# Altium PCB 400250.PcbDoc (part 1 of 2)
Units mil, origin at the board's own origin, x right, y up, seen from the top; angles counter-clockwise.
Board outline 1812.55 x 600 mil, 2 copper layers (Top Layer, Bottom Layer), stack 80.158 mil thick; 97 components, 62 nets, 288 pads, 110 vias.
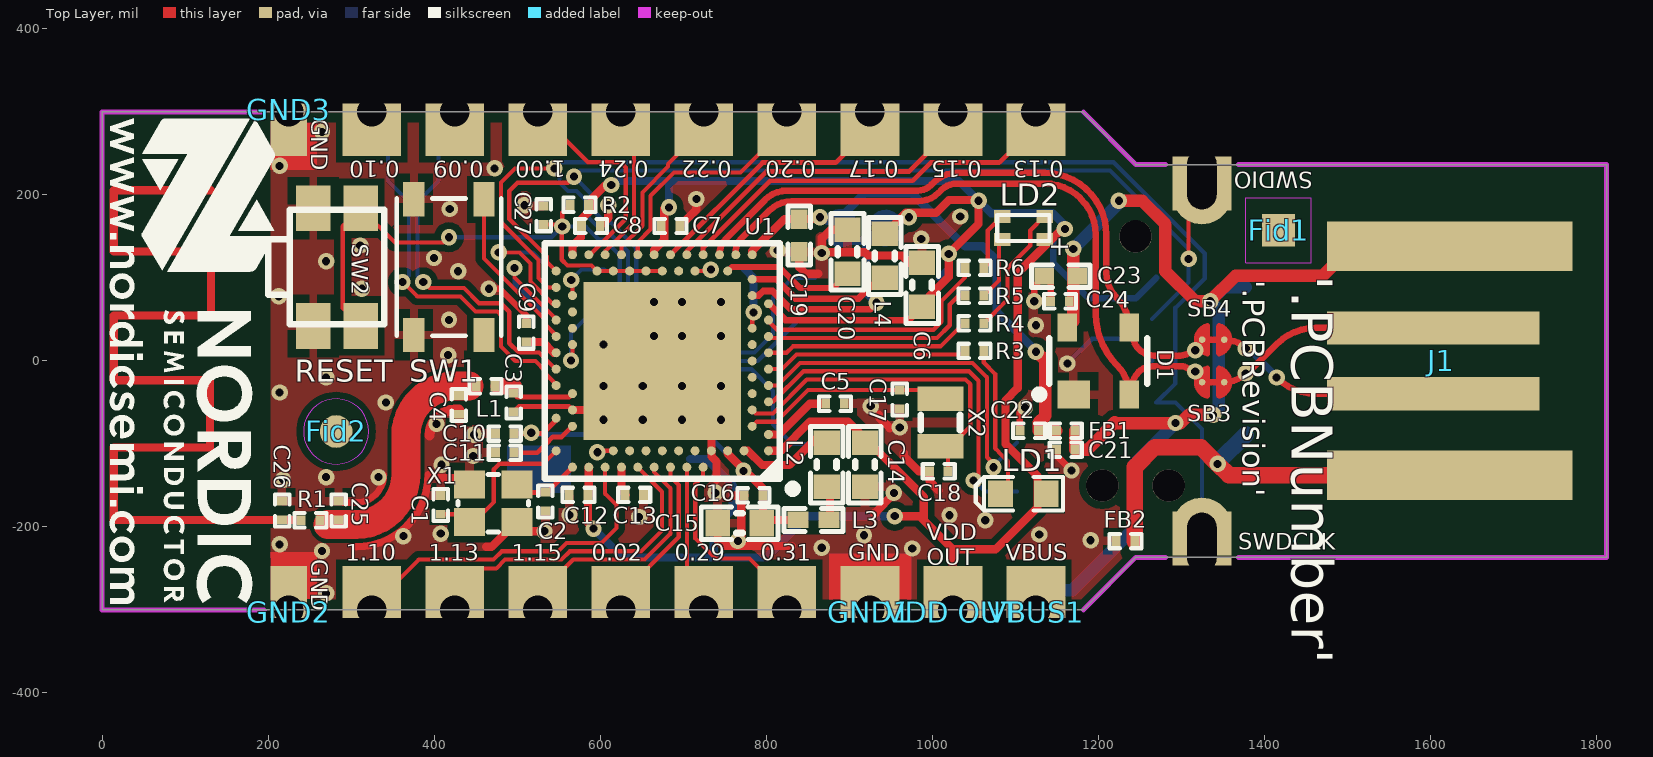
[diagram p0: Top Layer view]
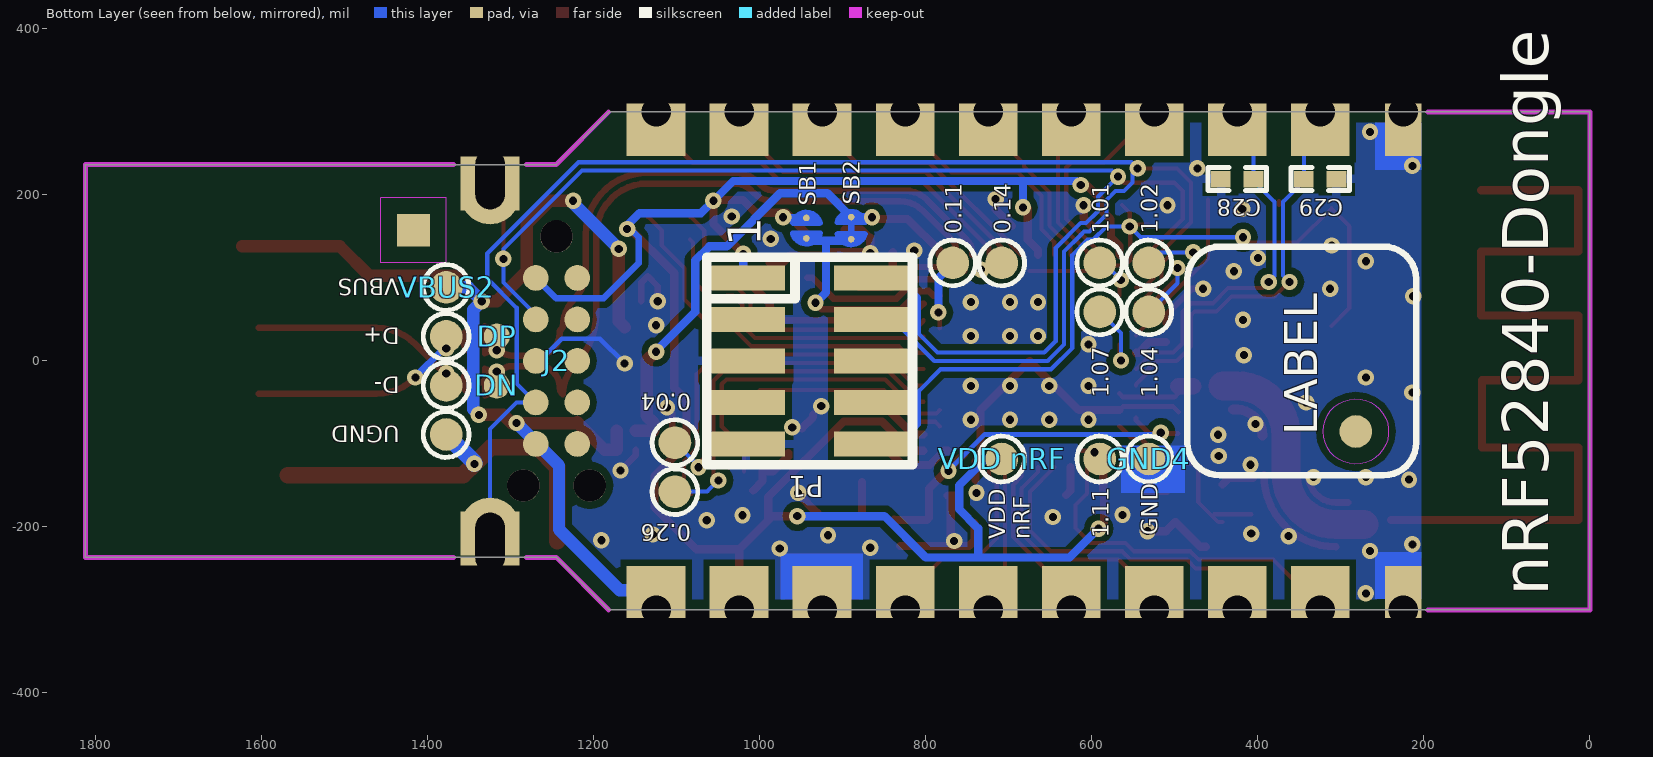
[diagram p1: Bottom Layer view, seen from below]

## Layer stack, top to bottom
Top Solder: solder mask 0.7087, Solder Resist, Dk 3.5
Top Layer: signal copper 0.7087
Dielectric1: core 78.7402, FR-4, Dk 4.8
Bottom Layer: signal copper 0.7087
Bottom Solder: solder mask 0.7087, Solder Resist, Dk 3.5

## Board outline
0,-300 0,300 1182.16,300 1245.55,236.61 1812.55,236.61 1812.55,-236.61 1245.55,-236.61 1182.16,-300

## Design rules (kind name [scope] priority, off if disabled: settings)
Clearance ANT_Clerance [InNet('ANT') or InNet('RF')] p1: gap=5 ignorepadtopadclearanceinfootprint=FALSE except(0: Arc-Hole Track-Hole SMDPad-Hole THPad-Hole Via-Hole Fill-Hole Poly-Hole Region-Hole Text-Hole)
Clearance NPTH [Not PadIsPlated And HoleSize > 0] p2: gap=9 ignorepadtopadclearanceinfootprint=FALSE except(0: Arc-Hole Track-Hole SMDPad-Hole THPad-Hole Via-Hole Fill-Hole Poly-Hole Region-Hole Text-Hole)
Clearance Polygon_Clearance [(InNamedPolygon('Top_Layer-GND')) or (InNamedPolygon('Bottom_Layer-GND')) or (InNamedPolygon('Mid_Layer_1-GND')) or (InNamedPolygon('Mid_Layer_2-GND'))] p3: gap=8 ignorepadtopadclearanceinfootprint=FALSE
Clearance SB_Clearance [HasFootprint('Solderbridge')] p4: gap=5 ignorepadtopadclearanceinfootprint=FALSE except(0: Arc-Hole Track-Hole SMDPad-Hole THPad-Hole Via-Hole Fill-Hole Poly-Hole Region-Hole Text-Hole)
Clearance [All] p5: gap=5 ignorepadtopadclearanceinfootprint=FALSE
ComponentClearance [All] p1 off: gap=10 collisioncheckmode=3 verticalgap=10 showdistances=FALSE
DiffPairsRouting [All] p1: maxlimit=5 minlimit=5 mostfreqgap=5 toplayer_minwidth=7.87 toplayer_maxwidth=7.87 toplayer_prefwidth=7.87 bottomlayer_minwidth=7.87 bottomlayer_maxwidth=7.87 bottomlayer_prefwidth=7.87 maxuncoupledlength=500
FabricationTestPointUsage TestPointUsage [All] p1: valid=0 allowmultiple=FALSE
FabricationTestpoint Testpoint [All] p1: side=3 testpointundercomponent=TRUE minsize=40 maxsize=100 preferedsize=60 minholesize=0 maxholesize=40 preferedholesize=32 testpointgrid=1 allowsidetop=TRUE allowsidebottom=TRUE usegrid=TRUE gridtolerance=0.01
Height [All] p1 off: minheight=0 maxheight=1000 prefheight=500
HoleSize [All] p1: absolutevalues=TRUE maxlimit=100 minlimit=3.94 maxpercent=80.000 minpercent=20.000
MinimumAnnularRing [All] p1 off: minimumring=6
PolygonConnect PolygonConnect_1 [isVia and innet(gnd)] p1: connectstyle=Direct reliefconductorwidth=10 reliefentries=4 polygonreliefangle="90 Angle" airgapwidth=10
PolygonConnect [All] p2: connectstyle=Relief reliefconductorwidth=10 reliefentries=4 polygonreliefangle="90 Angle" airgapwidth=10
RoutingVias [All] p1: holewidth=9.84 width=19.68 viastyle="Through Hole" minholewidth=3.94 minwidth=11.81 maxholewidth=12 maxwidth=24
SilkToSolderMaskClearance SilkscreenOverComponentPads [IsPad] p1: minsilkscreentomaskgap=10 clearancetoexposedcopper=TRUE
SolderMaskExpansion [All] p1: expansion=3
Width [All] p1: maxlimit=100 minlimit=5 preferedwidth=6 minimp=50.000000 maximp=50.000000 favimp=50.000000
23 further rules are at their usual default settings.

## Classes and differential pairs
differential pair D: +D_P -D_N

## Components (designator, comment, footprint, x,y, rotation, side; value= is the part's Value field where it differs from the comment)
0.02 "CH" Castellated_Hole_0.9mm 625,-300 r0 top locked
0.04 "Ø1.0mm,SMD" TP_SMD_Ø1.0mm#1 1102.36,-98.43 r180 bottom locked
0.09 "CH" Castellated_Hole_0.9mm 425,300 r180 top locked
0.10 "CH" Castellated_Hole_0.9mm 325,300 r180 top locked
0.11 "Ø1.0mm,SMD" TP_SMD_Ø1.0mm#1 767.72,118.11 r180 bottom locked
0.13 "CH" Castellated_Hole_0.9mm 1125,300 r180 top locked
0.14 "Ø1.0mm,SMD" TP_SMD_Ø1.0mm#1 708.66,118.11 r180 bottom locked
0.15 "CH" Castellated_Hole_0.9mm 1025,300 r180 top locked
0.17 "CH" Castellated_Hole_0.9mm 925,300 r180 top locked
0.20 "CH" Castellated_Hole_0.9mm 825,300 r180 top locked
0.22 "CH" Castellated_Hole_0.9mm 725,300 r180 top locked
0.24 "CH" Castellated_Hole_0.9mm 625,300 r180 top locked
0.26 "Ø1.0mm,SMD" TP_SMD_Ø1.0mm#1 1102.36,-157.48 r180 bottom locked
0.29 "CH" Castellated_Hole_0.9mm 725,-300 r0 top locked
0.31 "CH" Castellated_Hole_0.9mm 825,-300 r0 top locked
1.00 "CH" Castellated_Hole_0.9mm 525,300 r180 top locked
1.01 "Ø1.0mm,SMD" TP_SMD_Ø1.0mm#1 590.55,118.11 r180 bottom locked
1.02 "Ø1.0mm,SMD" TP_SMD_Ø1.0mm#1 531.5,118.11 r180 bottom locked
1.04 "Ø1.0mm,SMD" TP_SMD_Ø1.0mm#1 531.5,59.06 r180 bottom locked
1.07 "Ø1.0mm,SMD" TP_SMD_Ø1.0mm#1 590.55,59.06 r180 bottom locked
1.10 "CH" Castellated_Hole_0.9mm 325,-300 r0 top locked
1.11 "Ø1.0mm,SMD" TP_SMD_Ø1.0mm#1 590.55,-118.11 r180 bottom locked
1.13 "CH" Castellated_Hole_0.9mm 425,-300 r0 top locked
1.15 "CH" Castellated_Hole_0.9mm 525,-300 r0 top locked
C1 "12pF" CAPC0603X03L_C 408.16,-173.47 r90 top locked
C2 "12pF" CAPC0603X03L_C 534.16,-169.47 r270 top locked
C3 "1.0pF" CAPC0603X03L_C 495.8,-50.21 r90 top locked
C4 "1.0pF" CAPC0603X03L_C 430,-53 r90 top locked
C5 "100nF" CAPC0603X03L_C 883,-51.42 r0 top locked
C6 "4.7µF" CAPC1608X06L 988,91.58 r90 top locked
C7 "100nF" CAPC0603X03L_C 685,162.58 r0 top locked
C8 "100nF" CAPC0603X03L_C 589,162.58 r0 top locked
C9 "820pF" CAPC0603X03L_C 511,34 r90 top locked
C10 "N.C." CAPC0603X03L_C 485.16,-87.47 r0 top locked
C11 "100pF" CAPC0603X03L_C 485.16,-110.47 r180 top locked
C12 "100nF" CAPC0603X03L_C 574.16,-161.47 r180 top locked
C13 "N.C." CAPC0603X03L_C 641.16,-161.47 r0 top locked
C14 "1.0µF" CAPC1608X06L 919,-125 r270 top locked
C15 "1.0µF" CAPC1608X06L 768.16,-195.47 r0 top locked
C16 "47nF" CAPC0603X03L_C 785,-162 r180 top locked
C17 "12pF" CAPC0603X03L_C 961,-46.42 r270 top locked
C18 "12pF" CAPC0603X03L_C 1008,-133 r180 top locked
C19 "4.7µF" CAPC1005X04L 840,151 r270 top locked
C20 "4.7µF" CAPC1608X06L 898,131.58 r90 top locked
C21 "10nF" CAPC0603X03L_C 1161,-107 r0 top locked
C22 "100nF" CAPC0603X03L_C 1117,-84 r0 top locked
C23 "4.7µF" CAPC1005X04L 1155,102 r0 top locked
C24 "100nF" CAPC0603X03L_C 1154,72 r0 top locked
C25 "N.C." CAPC0603X03L_C 285,-180 r90 top locked
C26 "1.5pF" CAPC0603X03L_C 217,-180 r270 top locked
C27 "100nF" CAPC0603X03L_C 532,175.5 r270 top locked
C28 "N.C." CAPC1005X04L 425,219 r180 bottom locked
C29 "N.C." CAPC1005X04L 325,219 r180 bottom locked
D1 "PRTR5V0U2X" SOT190P230X110-4L 1200,0 r90 top locked
D+ "Ø1.0mm,SMD" TP_SMD_Ø1.0mm#1 1377.95,29.53 r180 bottom locked
D- "Ø1.0mm,SMD" TP_SMD_Ø1.0mm#1 1377.95,-29.53 r180 bottom locked
DN "Ø1.0mm,SMD" TP_SMD_Ø1.0mm#2 1316.93,-29.53 r270 bottom locked
DP "Ø1.0mm,SMD" TP_SMD_Ø1.0mm#2 1316.93,29.53 r270 bottom locked
FB1 "120R/0.85A" INDC0603X03L_C 1161,-84 r180 top locked
FB2 "120R/0.85A" INDC0603X03L_C 1233,-217 r180 top locked
Fid1 "Fiducial mark" Fiducial_Square 1417.32,157.48 r0 top locked
Fid2 "Fiducial mark" Fiducial 282,-85 r0 top locked
GND1 "GND" Castellated_Hole_0.9mm 925,-300 r0 top locked
GND2 "GND" Castellated_Hole_0.9mm_S 225,-300 r0 top locked
GND3 "GND" Castellated_Hole_0.9mm_S 225,300 r180 top locked
GND4 "GND" TP_SMD_Ø1.0mm#1 531.5,-118.11 r180 bottom locked
J1 "USB-A" USB-A-PCB 1615.7,0.39 r180 top locked
J2 "TC2050-IDC" TC2050-IDC-NLFP 1245,0 r270 bottom locked
L1 "3.9nH" INDC0603X03L_C 462.16,-30.34 r180 top locked
L2 "10µH" INDC1608X06L 873,-125 r90 top locked
L3 "15nH" INDC1005X04L 857,-191.42 r0 top locked
L4 "10µH" INDC1608X06L 943,126.58 r270 top locked
LD1 "L0603G" LED_0603_G 1110,-160 r0 top locked
LD2 "LED RGB" LED_RGB_0603 1110,160 r90 top locked
P1 "Pin Header 2x5, 1.27mm" HDR_2x5-SMD-1.27mm-NC 940,0 r270 bottom locked
R1 "0R" RESC0603X03L_C 251,-192 r180 top locked
R2 "10k" RESC0603X03L_C 575,188 r0 top locked
R3 "220R" RESC0603X03L_C 1051,12 r0 top locked
R4 "1k2" RESC0603X03L_C 1051,45.33 r0 top locked
R5 "2k2" RESC0603X03L_C 1051,78.67 r0 top locked
R6 "390R" RESC0603X03L_C 1051,112 r0 top locked
SB1 "Solderbridge" Solderbridge 944,160 r270 bottom locked
SB2 "Solderbridge" Solderbridge_Shorted 890,160 r90 bottom locked net-tie
SB3 "Solderbridge" Solderbridge_Shorted 1338.58,-25.59 r0 top locked net-tie
SB4 "Solderbridge" Solderbridge_Shorted 1338.58,25.59 r0 top locked net-tie
SW1 "PB SW" C&K_PTS810 418,113 r270 top locked
SW2 "PTS840 GK SMTR LFS" EVQP7A/J/B/K 283,113 r270 top locked
SWDCLK "CH" Castellated_Hole_0.9mm_D 1325,-218.9 r0 top locked
SWDIO "CH" Castellated_Hole_0.9mm_D 1325,218.9 r180 top locked
U1 "nRF52840-QIAA" AQFN50P700X700X85_HS-74N 675,0 r180 top locked
UGND "Ø1.0mm,SMD" TP_SMD_Ø1.0mm#1 1377.95,-88.58 r180 bottom locked
VBUS1 "VBUS" Castellated_Hole_0.9mm 1125,-300 r0 top locked
VBUS2 "VBUS" TP_SMD_Ø1.0mm#1 1377.95,88.58 r180 bottom locked
"VDD nRF" "Ø1.0mm,SMD" TP_SMD_Ø1.0mm#1 708.66,-118.11 r180 bottom locked
"VDD OUT" "CH" Castellated_Hole_0.9mm 1025,-300 r0 top locked
X1 "32MHz" BT-XTAL_2016 471.16,-171.47 r0 top locked
X2 "32.768kHz" XTAL_2012 1010,-74 r270 top locked

## Footprints (in the part's own frame and the unit in brackets; to place one, negate y for a bottom-side part, rotate by r counter-clockwise, add the part's x,y. Pads: shape width x height; smd on the part's side, far side on the other; paste and mask are expansions set on the pad)
AQFN50P700X700X85_HS-74N [mm] "AQFN, 73-Leads, Body 7.00x7.00mm, Pitch 0.50mm, Thermal Pad 4.95x4.95mm, IPC Medium Density"
  rect 4.83x4.83 smd mask+0.05: 74(0,0)
  round 0.275 smd paste+0.012 mask+0.05: A8(-1.25,3.25) A10(-0.75,3.25) A12(-0.25,3.25) A14(0.25,3.25) A16(0.75,3.25) A18(1.25,3.25) A20(1.75,3.25) A22(2.25,3.25) A23(2.75,3.25) AA24(3.25,-2.25) AB2(-2.75,-2.5) AC5(-2,-2.75) AC9(-1,-2.75) AC11(-0.5,-2.75) AC13(0,-2.75) AC15(0.5,-2.75) AC17(1,-2.75) AC19(1.5,-2.75) AC21(2,-2.75) AC24(3.25,-2.75) AD2(-2.75,-3.25) AD4(-2.25,-3.25) AD6(-1.75,-3.25) AD8(-1.25,-3.25) AD10(-0.75,-3.25) AD12(-0.25,-3.25) AD14(0.25,-3.25) AD16(0.75,-3.25) AD18(1.25,-3.25) AD20(1.75,-3.25) AD22(2.25,-3.25) AD23(2.75,-3.25) B1(-3.25,2.75) B3(-2.5,2.75) B5(-2,2.75) B7(-1.5,2.75) B9(-1,2.75) B11(-0.5,2.75) B13(0,2.75) B15(0.5,2.75) B17(1,2.75) B19(1.5,2.75) B24(3.25,2.75) C1(-3.25,2.25) D2(-2.75,2) D23(2.75,2) E24(3.25,1.75) F2(-2.75,1.5) F23(2.75,1.5) G1(-3.25,1.25) H2(-2.75,1) H23(2.75,1) J1(-3.25,0.75) J24(3.25,0.75) K2(-2.75,0.5) L1(-3.25,0.25) L24(3.25,0.25) M2(-2.75,0) N1(-3.25,-0.25) N24(3.25,-0.25) P2(-2.75,-0.5) P23(2.75,-0.5) R1(-3.25,-0.75) R24(3.25,-0.75) T2(-2.75,-1) T23(2.75,-1) U1(-3.25,-1.25) U24(3.25,-1.25) V23(2.75,-1.5) W1(-3.25,-1.75) W24(3.25,-1.75) Y2(-2.75,-2) Y23(2.75,-2)
  silkscreen extent -4.11,-3.6 3.6,4.04, body extent -3.55,-3.55 3.55,3.55, height 0.85
BT-XTAL_2016 [mm] "Crystal 2.0 x 1.6 mm"
  rect 0.95x0.85 smd: 1(-0.725,-0.575) 2(0.725,-0.575) 3(0.725,0.575) 4(-0.725,0.575)
  silkscreen extent -1.08,-0.88 1.08,0.88, body extent -1.05,-0.85 1.05,0.85, height 0.56
C&K_PTS810 [mm] "Microminiature SMT Top Actuated"
  rect 1.05x0.65 smd: 0(2.075,1.075) 1(-2.075,1.075) 2(-2.075,-1.075) 2(2.075,-1.075)
  silkscreen extent -2.1,-1.6 2.1,1.6, body extent -2.29,-1.6 2.29,1.6, height 2.5
CAPC0603X03L_C [mm] "Chip Capacitor, 2-Leads, Body 0.6x0.3mm, IPC High Density"
  rect 0.27x0.3 smd: 1(-0.285,0) 2(0.285,0)
  silkscreen extent -0.49,-0.22 0.49,0.22, body extent -0.3,-0.15 0.31,0.15, height 0.3
CAPC1005X04L [mm] "Chip Capacitor, 2-Leads, Body 1.0x0.5mm, IPC High Density"
  rect 0.6x0.5 smd: 1(-0.5,0) 2(0.5,0)
  silkscreen extent -0.9,-0.35 0.9,0.35, body extent -0.51,-0.25 0.51,0.25, height 0.5
CAPC1608X06L [mm] "Chip Capacitor, 2-Leads, Body 1.6x0.8mm, IPC High Density"
  rect 0.75x0.8 smd: 1(-0.675,0) 2(0.675,0)
  silkscreen extent -1.17,-0.5 1.17,0.5, body extent -0.8,-0.43 0.8,0.43, height 0.8
Castellated_Hole_0.9mm [mm]
  rect 1.8x0.25 hole 0.25 square: 1(0,-0.126)
  rect 1.8x1.35 hole 0.9 copper offset 0,0.675: 1(0,0)
Castellated_Hole_0.9mm_D [mm]
  rect 1.8x0.25 hole 0.25 square: 1(0,-0.576)
  rect 1.8x1.35 hole 0.9 slot 1.83 at 90 deg copper offset 0,0.275: 1(0,0)
  round 1.8 smd paste-5: 1(0,0.48)
  round 1.8 smd far side paste-5: 1(0,0.48)
Castellated_Hole_0.9mm_S [mm]
  rect 1.118x0.25 hole 0.25 square: 1(0,-0.126)
  rect 1.118x1.35 hole 0.9 copper offset 0,0.675: 1(0,0)
EVQP7A/J/B/K [mm] "Subminiature Side Actuated Tact Switch for SMT"
  rect 1.4x1.05 smd: 1(-1.8,0.725) 1(1.8,0.725) 2(-1.8,-0.725) 2(1.8,-0.725)
  silkscreen extent -1.75,-2.1 1.75,1.45, body extent -2.35,-2.1 2.35,1.45, height 1.35
Fiducial [mm] "Fiducial Mark"
  round 1 smd paste+0 mask+0.5: 0(0,0)
  round 1 smd far side paste+0 mask+0.5: 0(0,0)
  Top Layer keep-out circle w0.01: c0,0 r1
  Bottom Layer keep-out circle w0.01: c0,0 r1
Fiducial_Square [mm] "Fiducial Mark"
  rect 1x1 smd paste-10 mask+0.5: 0(0,0)
  rect 1x1 smd far side paste-10 mask+0.5: 0(0,0)
  Top Layer keep-out lines w0.01: -1,-1 1,-1 1,1 -1,1 -1,-1
  Bottom Layer keep-out lines w0.01: -1,-1 -1,1 1,1 1,-1 -1,-1
HDR_2x5-SMD-1.27mm-NC [mm] "SMT MICRO HEADER, (1,27) .050\""
  rect 0.76x2.4 smd: 1(-2.54,-1.95) 2(-2.54,1.95) 3(-1.27,-1.95) 4(-1.27,1.95) 5(0,-1.95) 6(0,1.95) 7(1.27,-1.95) 8(1.27,1.95) 9(2.54,-1.95) 10(2.54,1.95)
  silkscreen extent -3.18,-3.15 3.18,3.15
INDC0603X03L_C [mm] "Chip Inductor, 2-Leads, Body 0.6x0.3mm, IPC High Density"
  rect 0.27x0.3 smd: 1(-0.285,0) 2(0.285,0)
  silkscreen extent -0.49,-0.22 0.49,0.22, body extent -0.31,-0.16 0.31,0.16, height 0.26
INDC1005X04L [mm] "Chip Inductor, 2-Leads, Body 1.0x0.5mm, IPC High Density"
  rect 0.65x0.5 smd: 1(-0.475,0) 2(0.475,0)
  silkscreen extent -0.9,-0.35 0.9,0.35, body extent -0.5,-0.3 0.5,0.3, height 0.5
INDC1608X06L [mm] "Chip Inductor, 2-Leads, Body 1.6x0.8mm, IPC High Density"
  rect 0.75x0.8 smd: 1(-0.675,0) 2(0.675,0)
  silkscreen extent -1.17,-0.5 1.17,0.5, body extent -0.8,-0.48 0.8,0.48, height 0.8
LED_0603_G [mil] "SMD Super Bright LED, GREEN"
  rect 30x32 smd: 1(-27.5,0) 2(27.5,0)
  silkscreen extent -58,-20 48,20, body extent -32,-16 32,16, height 24
LED_RGB_0603 [mm]
  rect 0.4x0.5 smd paste+0: 1(0.35,-0.65) 2(-0.35,0.65) 3(0.35,0.65) 4(-0.35,-0.65)
  silkscreen extent -0.4,-0.8 0.4,0.8, body extent -0.4,-0.8 0.4,0.8, height 0.5
RESC0603X03L_C [mm] "Chip Resistor, 2-Leads, Body 0.6x0.3mm, IPC High Density"
  rect 0.27x0.3 smd: 1(-0.285,0) 2(0.285,0)
  silkscreen extent -0.49,-0.22 0.49,0.22, body extent -0.3,-0.15 0.3,0.15, height 0.23
Solderbridge [mm]
  round 0.2 smd paste-10: 1(-0.312,0) 2(0.312,0)
  Top Layer region: -0.077,-0.432 -0.152,-0.505 -0.271,-0.467 -0.335,-0.424 -0.409,-0.351 -0.462,-0.292 -0.521,-0.193 -0.549,-0.099 -0.544,0.122 -0.518,0.193 -0.434,0.33 -0.351,0.411 -0.259,0.469 -0.157,0.5 -0.107,0.483 -0.077,0.43
  Top Layer region: 0.077,0.432 0.152,0.505 0.271,0.467 0.335,0.424 0.409,0.351 0.462,0.292 0.521,0.193 0.549,0.099 0.544,-0.122 0.518,-0.193 0.434,-0.33 0.351,-0.411 0.259,-0.469 0.157,-0.5 0.107,-0.483 0.077,-0.43
  Top Layer lines w0.152: 0.153,0.431 cw(c0.042,0) 0.383,0.286 cw(c0.042,0) 0.478,-0.088 cw(c0.042,0) 0.153,-0.431 ; -0.153,0.431 ccw(c-0.042,0) -0.312,-0.353 ccw(c-0.042,0) -0.153,-0.431
Solderbridge_Shorted [mm]
  round 0.2 smd paste-10: 1(-0.338,0) 2(0.338,0)
  Top Layer region: 0.102,0.432 0.178,0.505 0.296,0.467 0.361,0.424 0.434,0.351 0.488,0.292 0.546,0.193 0.574,0.099 0.569,-0.122 0.544,-0.193 0.46,-0.33 0.376,-0.411 0.284,-0.469 0.183,-0.5 0.132,-0.483 0.102,-0.43
  Top Layer region: -0.102,-0.432 -0.178,-0.505 -0.296,-0.467 -0.361,-0.424 -0.434,-0.351 -0.488,-0.292 -0.546,-0.193 -0.574,-0.099 -0.569,0.122 -0.544,0.193 -0.46,0.33 -0.376,0.411 -0.284,0.469 -0.183,0.5 -0.132,0.483 -0.102,0.43
  Top Layer lines w0.152: -0.178,-0.431 cw(c-0.068,0) -0.178,0.431 ; 0.178,-0.431 ccw(c0.068,0) 0.178,0.431
  Top Layer lines w0.203: -0.338,0 0.338,0
SOT190P230X110-4L [mm] "SOT143, 4-Leads, Body 3.0x2.5mm (max), Pitch 1.90mm, IPC High Density"
  rect 0.85x1 smd: 1(-1.025,0.75)
  rect 0.85x0.6 smd: 2(-1.025,-0.95) 3(1.025,-0.95) 4(1.025,0.95)
  silkscreen extent -1.15,-1.5 0.7,1.92, body extent -1.21,-1.46 1.21,1.46, height 1
TC2050-IDC-NLFP [mil]
  round 39 hole 39 unplated: 0(-150,0) 0(150,-40) 0(150,40)
  round 31 smd paste-196.85: 1(-100,-25) 2(-50,-25) 3(0,-25) 4(50,-25) 5(100,-25) 6(100,25) 7(50,25) 8(0,25) 9(-50,25) 10(-100,25)
  Top Layer pour cut-out: -100,25 -100,-25 100,-25 100,25
TP_SMD_Ø1.0mm#1 [mm]
  round 1 smd paste-5: 1(0,0)
  silkscreen extent -0.7,-0.7 0.7,0.7
TP_SMD_Ø1.0mm#2 [mm]
  round 0.8 smd paste-5: 1(0,0)
USB-A-PCB [mil]
  rect 296x60 smd paste-196.85: 1(-7.87,-137.8) 4(-7.87,138)
  rect 256x40 smd paste-196.85: 2(12,-39.37) 3(12,40)
XTAL_2012 [mm] "XTAL SMD 2.0 x 1.2 mm"
  rect 0.75x1.4 smd: 1(-0.725,0) 2(0.725,0)
  silkscreen extent -0.24,-0.6 0.24,0.6, body extent -1,-0.61 1,0.61, height 0.6

## Part data
0.02 0.09 0.10 0.13 0.15 0.17 0.20 0.22 0.24 0.29 0.31 1.00 1.10 1.13 1.15 GND1 VBUS1 "VDD OUT": library part "Castellated Hole 0.9mm", "Castellated Hole 0.9mm", Artikkelnr Noca=N.A., Artikkelnr Simpro=N.A., ComponentLink1Description=Datasheet, ComponentLink2Description="Supplier link", LatestRevisionDate=2016-08-22, Part Number="Castellated Hole 0.9mm", Pin Count=1, Published=2016-08-22, Publisher="Nordic Semiconductor"
0.04 0.11 0.14 0.26 1.01 1.02 1.04 1.07 1.11 D+ D- DN DP GND4 UGND VBUS2 "VDD nRF": library part TP_SMD_Ø1.0MM, "1.0mm circular SMD testpad", Manufacturer="Nordic Semiconductor", Artikkelnr Noca=N.A., Artikkelnr Simpro=N.A., ComponentLink1Description=Datasheet, ComponentLink2Description="Supplier link", Footprint Doc=TP_SMD_Ø1.0mm, LatestRevisionDate=2013-06-11, Part Number=TP_SMD_Ø1.0MM, Pin Count=1, Published=2013-06-11, Publisher="Nordic Semiconductor"
C1 C2 C17 C18: library part C0201-12p, "Capacitor, NP0, ±2%", Part number IPS=00000007848, Artikkelnr Noca=N.A., Artikkelnr Simpro=N.A., ComponentLink1Description=Datasheet, ComponentLink2Description="Supplier link", Footprint Doc=0201, LatestRevisionDate=2017-11-09, Note=25V, Part Number=C0201-12p, Pin Count=2, Published=2014-11-13, Publisher="Nordic Semiconductor"
C3 C4: library part C0201-1.0p, "Capacitor, NP0, ±5%", Part number IPS=00000001247, Artikkelnr Noca=N.A., Artikkelnr Simpro=N.A., ComponentLink1Description=Datasheet, ComponentLink2Description="Supplier link", Footprint Doc=0201, LatestRevisionDate=2017-11-09, Note=50V, Part Number=C0201-1.0p, Pin Count=2, Published=2014-11-13, Publisher="Nordic Semiconductor"
C5 C7 C8 C12 C22 C24 C27: library part C0201-100n, "Capacitor, X5R, ±10%", Part number IPS=00000001248, Artikkelnr Noca=N.A., Artikkelnr Simpro=N.A., ComponentLink1Description=Datasheet, ComponentLink2Description="Supplier link", Footprint Doc=0201, LatestRevisionDate=2017-11-09, Note=16V, Part Number=C0201-100n, Pin Count=2, Published=2014-11-13, Publisher="Nordic Semiconductor"
C6 C20: library part C0603-4µ7, "Capacitor, X5R, ±10%", Part number IPS=00000007783, Artikkelnr Noca=20069060, Artikkelnr Simpro=N.A., ComponentLink1Description=Datasheet, ComponentLink2Description="Supplier link", Footprint Doc=0603, LatestRevisionDate=2009-11-23, Note=6.3V, Part Number=C0603-4µ7, Pin Count=2, Published=2009-05-08, Publisher="Nordic Semiconductor"
C9: library part C0201-820p, "Capacitor, X7R, ±10%", Part number IPS=00000001249, Artikkelnr Noca=N.A., Artikkelnr Simpro=N.A., ComponentLink1Description=Datasheet, ComponentLink2Description="Supplier link", Footprint Doc=0201, LatestRevisionDate=2017-11-09, Note=25V, Part Number=C0201-820p, Pin Count=2, Published=2014-11-13, Publisher="Nordic Semiconductor"
C10 C13 C25: library part C0201-N.C., "Not mounted", Artikkelnr Noca=N.A., Artikkelnr Simpro=N.A., Assembly="Not mounted", ComponentLink1Description=Datasheet, ComponentLink2Description="Supplier link", Footprint Doc=0201, LatestRevisionDate=2014-11-13, Note="Chip Cap", Part Number=C0201-N.C., Pin Count=2, Published=2014-11-13, Publisher="Nordic Semiconductor"
C11: library part C0201-100p, "Capacitor, NP0, ±2%", Part number IPS=00000007853, Artikkelnr Noca=N.A., Artikkelnr Simpro=N.A., ComponentLink1Description=Datasheet, ComponentLink2Description="Supplier link", Footprint Doc=0201, LatestRevisionDate=2017-11-09, Note=25V, Part Number=C0201-100p, Pin Count=2, Published=2014-11-13, Publisher="Nordic Semiconductor"
C14 C15: library part C0603-1µ0, "Capacitor, X7R, ±10%", Part number IPS=00000000616, Artikkelnr Noca=20039335, Artikkelnr Simpro=N.A., ComponentLink1Description=Datasheet, ComponentLink2Description="Supplier link", Footprint Doc=0603, LatestRevisionDate=2013-06-05, Note=16V, Part Number=C0603-1µ0, Pin Count=2, Published=2009-05-08, Publisher="Nordic Semiconductor"
C16: library part C0201-47n, "Capacitor, X5R, ±10%", Part number IPS=00000001250, Artikkelnr Noca=N.A., Artikkelnr Simpro=N.A., ComponentLink1Description=Datasheet, ComponentLink2Description="Supplier link", Footprint Doc=0201, LatestRevisionDate=2017-11-09, Note=10V, Part Number=C0201-47n, Pin Count=2, Published=2014-11-13, Publisher="Nordic Semiconductor"
C19 C23: library part C0402-4µ7, "Capacitor, X5R, ±20%", Part number IPS=00000001251, Supplier part number=490-13252-1-ND, Artikkelnr Noca=20039482, Artikkelnr Simpro=N.A., ComponentLink1Description=Datasheet, ComponentLink2Description="Supplier link", Footprint Doc=0402, LatestRevisionDate=2017-11-09, Note=10V, Part Number=C0402-4µ7, Pin Count=2, Published=2009-05-08, Publisher="Nordic Semiconductor", Supplier=Digi-Key
C21: library part C0201-10n, "Capacitor, X7R, ±10%", Part number IPS=00000003480, Artikkelnr Noca=N.A., Artikkelnr Simpro=N.A., ComponentLink1Description=Datasheet, ComponentLink2Description="Supplier link", Footprint Doc=0201, LatestRevisionDate=2017-11-09, Note=10V, Part Number=C0201-10n, Pin Count=2, Published=2014-11-13, Publisher="Nordic Semiconductor"
C26: library part C0201-1.5p, "Capacitor, NP0, ±0.1pF", Part number IPS=00000007107, Artikkelnr Noca=N.A., Artikkelnr Simpro=N.A., ComponentLink1Description=Datasheet, ComponentLink2Description="Supplier link", Footprint Doc=0201, LatestRevisionDate=2017-11-09, Note=50V, Part Number=C0201-1.5p, Pin Count=2, Published=2014-11-13, Publisher="Nordic Semiconductor"
C28 C29: library part C0402-N.C., "Not mounted", Artikkelnr Noca=N.A., Artikkelnr Simpro=N.A., Assembly="Not mounted", ComponentLink1Description=Datasheet, ComponentLink2Description="Supplier link", Footprint Doc=0402, LatestRevisionDate=2009-05-08, Note="Chip Cap", Part Number=C0402-N.C., Pin Count=2, Published=2009-05-08, Publisher="Nordic Semiconductor"
D1: "Ultra low capacitance double rail-to-rail ESD protection diode", 2nd source part number=152-4157, Manufacturer=NXP, Part number IPS=00000009951, Supplier part number=568-4140-1-ND, 2nd source Supplier=Farnell, Artikkelnr Noca=10069015, Artikkelnr Simpro=N.A., ComponentLink1Description=Datasheet, ComponentLink2Description="Supplier link", Footprint Doc=SOT-143B, HelpURL=http://www.farnell.com/datasheets/109718.pdf, LatestRevisionDate=2017-11-09, Manufacturer Part Number=PRTR5V0U2X, Part Number=PRTR5V0U2X, Pin Count=4, Published=2012-06-11, Publisher="Nordic Semiconductor", Supplier=Digi-Key
FB1 FB2: library part FB0201-120R@100M-850mA, "Ferrite Bead, 120 Ohm @ 100MHz, 850mA, 150 mOhm Max", Manufacturer="Taiyo Yuden", Manufacturer Part Number=BKP0603HS121-T, Part number IPS=00000001252, Supplier part number=587-3286-1-ND, Artikkelnr Noca=N.A., Artikkelnr Simpro=N.A., ComponentLink1Description=Datasheet, ComponentLink2Description="Supplier link", Footprint Doc=0402, HelpURL=http://ds.yuden.co.jp/TYCOMPAS/ut/detail.do?productNo=BKP0603HS121-T&fileName=BKP0603HS121-T_SS&mode=specSheetDownload, LatestRevisionDate=2016-08-23, Note="Chip EMIFIL Inductor Type Chip Ferrite Bead", Part Number=FB0201-120R@100M-850mA, Pin Count=2, Published=2016-08-23, Publisher="Nordic Semiconductor", Supplier=Digi-Key
Fid1: library part Fid-Mark-Square, "Fiducial Mark", Artikkelnr Noca=N.A., Artikkelnr Simpro=N.A., ComponentLink1Description=Datasheet, ComponentLink2Description="Supplier link", Footprint Doc=Fiducial, LatestRevisionDate=2017-01-30, Part Number=Fid-Mark-Square, Pin Count=1, Published=2009-12-12, Publisher="Nordic Semiconductor"
Fid2: library part Fid-Mark, "Fiducial Mark", Artikkelnr Noca=N.A., Artikkelnr Simpro=N.A., ComponentLink1Description=Datasheet, ComponentLink2Description="Supplier link", Footprint Doc=Fiducial, LatestRevisionDate=2009-12-12, Part Number=Fid-Mark, Pin Count=1, Published=2009-12-12, Publisher="Nordic Semiconductor"
GND2 GND3: library part "Castellated Hole 0.9mm_S", "Castellated Hole 0.9mm", Artikkelnr Noca=N.A., Artikkelnr Simpro=N.A., ComponentLink1Description=Datasheet, ComponentLink2Description="Supplier link", LatestRevisionDate=2018-01-24, Part Number="Castellated Hole 0.9mm_S", Pin Count=1, Published=2018-01-24, Publisher="Nordic Semiconductor"
J1: library part USB-A-PCB, "USB-A PCB footprint", Artikkelnr Noca=N.A., Artikkelnr Simpro=N.A., ComponentLink1Description=Datasheet, ComponentLink2Description="Supplier link", Footprint Doc=USB-A-PCB, LatestRevisionDate=2014-06-04, Part Number=USB-A-PCB, Pin Count=4, Published=2014-06-04, Publisher="Nordic Semiconductor"
J2: library part TC2050-IDC-NLFP, "CBL PLUG-OF-NAILS 10-PIN", Manufacturer="Tag-Connect LLC", Supplier part number=TC2050-IDC-NL-ND, Artikkelnr Noca=N.A., Artikkelnr Simpro=N.A., ComponentLink1Description=Datasheet, ComponentLink2Description="Supplier link", Footprint Doc=TC2050-IDC-NLFP, HelpURL=http://www.tag-connect.com/Materials/TC2050-IDC%20Datasheet.pdf, LatestRevisionDate=2012-11-21, Manufacturer Part Number=TC2050-IDC-NLFP, Part Number=TC2050-IDC-NLFP, Pin Count=10, Published=2012-11-21, Publisher="Nordic Semiconductor", Supplier=Digi-Key
L1: library part L0201-3n9, "Inductor, 400mA, ±0.1nH", Part number IPS=00000001253, Artikkelnr Noca=N.A., Artikkelnr Simpro=N.A., ComponentLink1Description=Datasheet, ComponentLink2Description="Supplier link", Footprint Doc=0201, LatestRevisionDate=2017-11-09, Note="High frequency chip inductor ±5%", Part Number=L0201-3n9, Pin Count=2, Published=2013-04-10, Publisher="Nordic Semiconductor"
L2 L4: library part L0603-10µ, "Inductor, 80mA, ±10%", 2nd source part number=178-6105, Manufacturer="Taiyo Yuden", Manufacturer Part Number=LBMF1608T100K, Part number IPS=00000007794, Supplier part number=587-1714-1-ND, 2nd source Supplier=Farnell, Artikkelnr Noca=33029314, Artikkelnr Simpro=N.A., ComponentLink1Description=Datasheet, ComponentLink2Description="Supplier link", Footprint Doc=0603, HelpURL=http://www.yuden.co.jp/ut/product/pdf/elb2_e.pdf, LatestRevisionDate=2012-09-19, Note="LBMF1608T100K 10µH 80mA 0603", Part Number=L0603-10µ, Pin Count=2, Published=2010-02-24, Publisher="Nordic Semiconductor", Supplier=Digi-Key
L3: library part L0402-15n, "Inductor, 320mA, ±5%", 2nd source part number=658-1328, Manufacturer="Taiyo Yuden", Manufacturer Part Number=HK100515NJ-T, Part number IPS=00000001262, Supplier part number=587-1521-1-ND, 2nd source Supplier=Farnell, Artikkelnr Noca=33029323, Artikkelnr Simpro=N.A., ComponentLink1Description=Datasheet, ComponentLink2Description="Supplier link", Footprint Doc=0402, HelpURL=http://www.yuden.co.jp/productdata/catalog/en/mlci04_e.pdf, LatestRevisionDate=2012-09-19, Note="High frequency chip inductor ±10%", Part Number=L0402-15n, Pin Count=2, Published=2010-07-12, Publisher="Nordic Semiconductor", Supplier=Digi-Key
LD1: library part "VS 25C7M5", "LED, Green, 0603, 573nm, Vf=2.0V, 24mcd, - 40 to +85°C", Manufacturer="Victory Electronics", Artikkelnr Noca=N.A., Artikkelnr Simpro=N.A., ComponentLink1Description=Datasheet, ComponentLink2Description="Supplier link", Footprint Doc=0603, HelpURL="\\hizz\pro\app9717\Datasheet\optoelectronics\Victory Electronics\VS 25C7M5.pdf", LatestRevisionDate=2017-08-21, Manufacturer Part Number="VS 25C7M5", Part Number="VS 25C7M5", Pin Count=2, Published=2017-08-21, Publisher="Nordic Semiconductor", Supplier="EC Partner"
LD2: library part APHF1608LSEEQBDZGKC, "RGB LED 1.60 mm x 0.80 mm SMD", Manufacturer="Kingbright Company LLC", Part number IPS=00000001254, Supplier part number=754-2143-1-ND, Artikkelnr Noca=N.A., Artikkelnr Simpro=N.A., ComponentLink1Description=Datasheet, ComponentLink2Description="Supplier link", Footprint Doc=LED_RGB_0603, HelpURL=http://www.kingbrightusa.com/images/catalog/SPEC/APHF1608LSEEQBDZGKC.pdf, LatestRevisionDate=2017-11-09, Manufacturer Part Number=APHF1608LSEEQBDZGKC, Part Number=APHF1608LSEEQBDZGKC, Pin Count=4, Published=2017-09-18, Publisher="Nordic Semiconductor", Supplier=Digi-Key
P1: library part "Pin Header 2x5 SMD, 1.27mm, KS, N.C.", "Pin Header 2x5, 1.27mm (50mil), SMD, Keying Shroud", 2nd source part number=FTSH-105-01-F-DV-K, Manufacturer=W-CON, Manufacturer Part Number=3132-10MS0BK00R1, 2nd source Supplier=Samtec, Artikkelnr Noca=N.A., Artikkelnr Simpro=N.A., Assembly="Not mounted", ComponentLink1Description=Datasheet, ComponentLink2Description="Supplier link", Footprint Doc=HDR_2x5-SMD-1.27mm, HelpURL=\\hizz\pro\app9717\Datasheet\connectores\W-CON\3132-XXMXXBK00XX.pdf, LatestRevisionDate=2017-09-07, Part Number="Pin Header 2x5 SMD, 1.27mm, KS, N.C.", Pin Count=10, Published=2017-09-07, Publisher="Nordic Semiconductor", Supplier=Cabcon, Supplier part number=3132-10MS0BK00R1
R1: library part R0201-0R, "Resistor, ±5%, 0.05W", Part number IPS=00000003245, Value Ohm=0, Artikkelnr Noca=N.A., Artikkelnr Simpro=N.A., ComponentLink1Description=Datasheet, ComponentLink2Description="Supplier link", Footprint Doc=0201, LatestRevisionDate=2017-11-09, Note="Chip Res 5%", Part Number=R0201-0R, Pin Count=2, Published=2014-11-13, Publisher="Nordic Semiconductor"
R2: library part R0201-10k, "Resistor, ±1%, 0.05W", Part number IPS=00000001255, Value Ohm=10000, Artikkelnr Noca=N.A., Artikkelnr Simpro=N.A., ComponentLink1Description=Datasheet, ComponentLink2Description="Supplier link", Footprint Doc=0201, LatestRevisionDate=2014-11-13, Note="Chip Res 1%", Part Number=R0201-10k, Pin Count=2, Published=2014-11-13, Publisher="Nordic Semiconductor"
R3: library part R0201-220, "Resistor, ±1%, 0.05W", Part number IPS=00000000863, Value Ohm=220, Artikkelnr Noca=N.A., Artikkelnr Simpro=N.A., ComponentLink1Description=Datasheet, ComponentLink2Description="Supplier link", Footprint Doc=0201, LatestRevisionDate=2014-11-13, Note="Chip Res 1%", Part Number=R0201-220, Pin Count=2, Published=2014-11-13, Publisher="Nordic Semiconductor"
R4: library part R0201-1k2, "Resistor, ±1%, 0.05W", Part number IPS=00000001256, Value Ohm=1200, Artikkelnr Noca=N.A., Artikkelnr Simpro=N.A., ComponentLink1Description=Datasheet, ComponentLink2Description="Supplier link", Footprint Doc=0201, LatestRevisionDate=2014-11-13, Note="Chip Res 1%", Part Number=R0201-1k2, Pin Count=2, Published=2014-11-13, Publisher="Nordic Semiconductor"
R5: library part R0201-2k2, "Resistor, ±1%, 0.05W", Part number IPS=00000001257, Value Ohm=2200, Artikkelnr Noca=N.A., Artikkelnr Simpro=N.A., ComponentLink1Description=Datasheet, ComponentLink2Description="Supplier link", Footprint Doc=0201, LatestRevisionDate=2014-11-13, Note="Chip Res 1%", Part Number=R0201-2k2, Pin Count=2, Published=2014-11-13, Publisher="Nordic Semiconductor"
R6: library part R0201-390, "Resistor, ±1%, 0.05W", Part number IPS=00000001258, Value Ohm=390, Artikkelnr Noca=N.A., Artikkelnr Simpro=N.A., ComponentLink1Description=Datasheet, ComponentLink2Description="Supplier link", Footprint Doc=0201, LatestRevisionDate=2014-11-13, Note="Chip Res 1%", Part Number=R0201-390, Pin Count=2, Published=2014-11-13, Publisher="Nordic Semiconductor"
SB2 SB3 SB4: library part "Solderbridge Shorted", "Shorted Solderbridge", Artikkelnr Noca=N.A., Artikkelnr Simpro=N.A., ComponentLink1Description=Datasheet, ComponentLink2Description="Supplier link", Footprint Doc=Solderbridge_Shorted, LatestRevisionDate=2012-08-07, Part Number="Solderbridge Shorted", Pin Count=2, Published=2012-08-07, Publisher="Nordic Semiconductor"
SW1: library part "PTS810 SJK 250 SMTR LFS", "Tactile Switch, SPNO, SMD, 260gf, 4.2x3.2x2.5mm", Manufacturer="C&K Components", Part number IPS=00000001259, Supplier part number=CKN10503TR-ND, Artikkelnr Noca=N.A., Artikkelnr Simpro=N.A., ComponentLink1Description=Datasheet, ComponentLink2Description="Supplier link", Footprint Doc=PTS810, HelpURL=http://www.ckswitches.com/media/1476/pts810.pdf, LatestRevisionDate=2017-11-09, Manufacturer Part Number="PTS810 SJK 250 SMTR LFS", Part Number="PTS810 SJK 250 SMTR LFS", Pin Count=4, Published=2017-09-18, Publisher="Nordic Semiconductor", Supplier=Digi-Key
SW2: "Microminiature SMT Switch, Side Actuated", 2nd source part number=611-PTS840GKSMTR, Manufacturer="C&K Components", Part number IPS=00000001260, Supplier part number=CKN10508CT-ND, 2nd source Supplier=Mouser, Artikkelnr Noca=50019089, Artikkelnr Simpro=N.A., ComponentLink1Description=Datasheet, ComponentLink2Description="Supplier link", Footprint Doc="PTS840 Gx", HelpURL=http://www.ck-components.com/80185/pts840_11june13.pdf/, LatestRevisionDate=2017-11-09, Manufacturer Part Number="PTS840 GK SMTR LFS", Note="Tactile Switch, SPST, SMD, 220gf", Part Number="PTS840 GK SMTR LFS", Pin Count=4, Published=2014-08-12, Publisher="Nordic Semiconductor", Supplier=Digi-Key
SWDCLK SWDIO: library part "Castellated Hole 0.9mm_D", "Castellated Hole 0.9mm", Artikkelnr Noca=N.A., Artikkelnr Simpro=N.A., ComponentLink1Description=Datasheet, ComponentLink2Description="Supplier link", LatestRevisionDate=2018-01-24, Part Number="Castellated Hole 0.9mm_D", Pin Count=1, Published=2018-01-24, Publisher="Nordic Semiconductor"
U1: library part nRF52840-QIAAC0, "Multi-protocol Bluetooth Low Energy, IEEE 802.15.4, ANT and 2.4GHz proprietary system-on-chip", Manufacturer="Nordic Semiconductor", Part number IPS=N.A., Artikkelnr Noca=15079380, Artikkelnr Simpro=N.A., ComponentLink1Description=Datasheet, ComponentLink2Description="Supplier link", Footprint Doc=AQFN-73, LatestRevisionDate=2018-02-27, Manufacturer Part Number=nRF52840-QIAAC0, Part Number=nRF52840-QIAAC0, Pin Count=73, Published=2017-08-21, Publisher="Nordic Semiconductor", Supplier="Nordic Semiconductor", Supplier part number=nRF52840-QIAAC0
X1: library part XTAL_SMD2016_32MHz_8pF_Murata, "XTAL SMD 2016, 32MHz, Cl=8pF, Tol: ±10ppm, Stab: ±10ppm", Manufacturer=Murata, Manufacturer Part Number=XRCGB32M000F1H01R0, Part number IPS=80000001424, Artikkelnr Noca=N.A., Artikkelnr Simpro=N.A., ComponentLink1Description=Datasheet, ComponentLink2Description="Supplier link", Footprint Doc=XTAL_2016, HelpURL=http://www.murata.com/en-global/products/productdetail.aspx?cate=cgsubCrystalUnits&partno=XRCGB32M000F1H01R0, LatestRevisionDate=2017-11-09, Note="XTAL SMD 32.000MHz", Part Number=XTAL_SMD2016_32MHz_8pF_Murata, Pin Count=4, Published=2016-10-26, Publisher="Nordic Semiconductor"
X2: library part XTAL_SMD2012_32.768kHz_9pF_Seiko, "XTAL SMD 2012, 32.768kHz, 9pF, ±20ppm", Manufacturer=Seiko, Manufacturer Part Number=SC20S-9.0PF20PPM, Part number IPS=80000001425, Artikkelnr Noca=N.A., Artikkelnr Simpro=N.A., ComponentLink1Description=Datasheet, ComponentLink2Description="Supplier link", Footprint Doc=XTAL_2012, HelpURL=http://www.sii.co.jp/en/quartz/files/2013/03/file_PRODUCT_MASTER_50811_GRAPHIC03.pdf, LatestRevisionDate=2017-11-09, Note="XTAL SMD 32.768kHz", Part Number=XTAL_SMD2012_32.768kHz_9pF_Seiko, Pin Count=2, Published=2015-10-15, Publisher="Nordic Semiconductor"
SB1: Artikkelnr Noca=N.A., Artikkelnr Simpro=N.A., ComponentLink1Description=Datasheet, ComponentLink2Description="Supplier link", Footprint Doc=Solderbridge, LatestRevisionDate=2009-12-14, Part Number=Solderbridge, Pin Count=2, Published=2009-12-14, Publisher="Nordic Semiconductor"

## Free pads (board coordinates)
  round 70.87 smd paste-196.85: 3(1325,-200) 3(1325,200)
  round 70.87 smd far side paste-196.85: 3(1325,-200) 3(1325,200)

## Via types
v1: diameter 19.68, hole 9.84, Top Layer to Bottom Layer, tented both sides, 110 vias

## Nets (pads, with @x,y where several pads share a name; then routed paths per layer and width w, separated by ;. In a path a pad name is that pad's centre, name@x,y a point inside that pad or via, vN(x,y) a via of type N, cw(c..) or ccw(c..) an arc to the next point about the centre after c; other vN are vias at no path point)
ANT: C26.2 R1.2 | length 1205.1
  Top Layer w10: 131,205.74 14.3,205.74 14.3,131.74 131.19,131.74 131.19,54.74 14.3,54.74 14.3,-23.26 130.19,-23.26 130.19,-104.26 14.3,-104.26 14.3,-191.58 R1.2@239.78,-191.58
D_N: D1.2 DN.1 SB3.1 U1.AD4 | length 825.6
  Top Layer w7.87: U1.AD4 763.58,134 cw(c780.06,134) 768.41,145.65 803.88,181.12 cw(c830.92,154.08) 830.92,192.32 982.82,192.32 ccw(c982.82,227.84) 1007.93,202.73 1011.1,205.9 cw(c1029.99,187.01) 1029.99,213.72 1135.41,213.72 cw(c1135.41,152) 1197.13,152 1197.13,56.88 ccw(c1284.74,56.88) 1222.79,-5.07 cw(c1187.5,-40.35) D1.2 ccw(c1227.9,-30.85) 1241.34,-30.85 cw(c1265.75,-30.85) 1265.75,-6.44 1299.21,-6.44 cw(c1299.21,-23.13) 1311.02,-11.33 SB3.1
  other v1: 1316.93,-12.8
D_P: D1.3 DP.1 SB4.1 U1.AD6 | length 784.7
  Top Layer w7.87: U1.AD6 cw(c771.41,127.95) 751.96,147.41 798.55,194 ; 798.56,194.01 cw(c825.59,166.95) 825.59,205.2 982.82,205.2 ccw(c982.82,227.84) 998.83,211.83 1002,215 cw(c1029.99,187.01) 1029.99,226.59 1135.41,226.59 cw(c1135.41,152) 1210,152 1210,106.51 ccw(c1253.65,106.51) 1222.79,75.64 cw(c1187.5,40.35) D1.3 1238.79,38.96 cw(c1232.64,32.82) 1241.34,32.82 ccw(c1267.72,32.82) 1267.72,6.44 1299.21,6.44 ccw(c1299.21,23.13) 1311.02,11.33 SB4.1
  other v1: 1316.93,12.8
DEC1: C5.1 U1.C1 | length 84.2
  Top Layer w10: U1.C1 815.53,-88.58 852.7,-51.42 C5.1
DEC3: C11.1 U1.D23 | length 83.5
  Top Layer w5.71: C11.1 524.17,-110.47 535.16,-99.49
  Top Layer w5.91: 535.16,-99.49 543.11,-91.54 553.72,-91.54 566.51,-78.74 U1.D23
DEC4_6: C10.2 C15.2 C16.1 L3.1 U1.B5 U1.E24 | length 475.5
  Top Layer w5.71: C10.2 517,-87.47 530.75,-87.47
  Top Layer w5.91: 530.75,-87.47 547.05,-71.17 U1.E24
  Top Layer w9.84: U1.B5 753.74,-111.27 796.22,-153.75 796.22,-188.85 798.84,-191.47 L3.1 L3.1
  Bottom Layer w5.71: v1@517,-87.47 518.09,-88.56 729.03,-88.56 v1(772.87,-132.4)
  other v1: 517,-86.47
GND: C1.2 C2.2 C3.1 C4.1 C5.2 C6.2 C7.2 C8.2 C9.2 C10.1 C11.2 C12.2 C13.2 C14.2 C15.1 C16.2 C17.2 C18.2 C19.2 C20.2 C21.1 C22.1 C23.1 C24.1 C25.2 C26.1 C27.1 C28.1 C29.2 D1.1 FB2.2 GND1.1 GND2.1 GND3.1 GND4.1 J2.3 P1.3 P1.5 P1.9 SW1.2 SW2.2 U1.74 U1.B7 U1.F23 X1.2 X1.4 | length 1691
  Top Layer w5: SW1.2@374.69,187.81 SW1.2@374.69,192.72
  Top Layer w5.71: C3.1 502.31,-54.92 562.6,-54.92 U1.F23
  Top Layer w8: 291,-170.5 306,-170.5 ccw(c306,-137) v1@339.5,-137 ; v1(466,87) 479.11,87 511,55.11 C9.2 ; C22.1 1105.78,-62.22 v1(1112,-56) ; v1(1123,72) 1123,90 1135,102 C23.1 1142.78,94.54 C24.1 ; C21.1 1149.78,-113.78 v1(1168,-132)
  Top Layer w9: 306,-224 ccw(c306,-137) 393,-137
  Top Layer w9.84: U1.F23 615.94,-59.06 U1.74 734.06,-59.06 U1.B7 734.06,-115.11 740.26,-121.31 740.26,-143.41
  Top Layer w10: 406,-141 434.78,-141 X1.4 ; 463,-224 469.18,-224 499.07,-194.11 X1.2 510.59,-205 v1(533,-205) ; C8.2 610,172.36 v1@610,190 ; C7.2 716,182.36 v1(716,195) ; C15.1 741.58,-216.58 748,-223 831,-223 ; 763,-162 C16.2 769.97,-165.81 v1@769.97,-211 ; C19.2 840,113 848,105 863,105 ; C20.2 878.21,158.15 868.67,148.61 867,148.61 v1(867,130) 868,131 919,131 923,127 964,127 972.85,118.15 C6.2 ; 931,-185 931,-182.94 954,-159.94 v1(954,-159) ; 936,-65 936,-68 949,-81 ; 966,-111 966,-115.01 983.99,-133 C18.2 996.78,-144.78 1008,-156
  Top Layer w12: 394.5,-90 cw(c426,-90) 429.97,-58.75
  Bottom Layer w5.71: v1(1163,-3) 1192.65,26.65 1238.74,26.65 J2.3@1265,0.39
  other v1: 270,-280 265,-229 976,-226 867,-225 214,-221 766,-217 1191,-216 363,-211 918,-210 1129,-209 408,-208 1064,-192 647,-188 1021,-186 563.16,-185.47 739,-159 218,-143 270,-140 333,-140 409,-125 447.16,-114.47 448,-89 961,-80 403,-76 604.13,-70.87 651.38,-70.87 698.62,-70.87 745.87,-70.87 926,-54.42 342,-50 214,-38 604.13,-30 651.38,-30 698.62,-30 745.87,-30 270,-20 417,7 604.13,20 665,30 698.62,30 745.87,30 1125,43 418,49.5 665,70.87 698.62,70.87 745.87,70.87 213,78 313,87 429,108 270,120 400,124 814,133 311,139 987,147 1034,174 419,183 509,187.5 610,187.5 473,232 214,235 265,276
LED1: R3.1 U1.L1 | length 245.9
  Top Layer w5: U1.L1 819.15,-9.84 836.61,7.61 1035.39,7.61 R3.1
LED2_B: R6.1 U1.U1 | length 294.6
  Top Layer w5: U1.U1 802.95,47.79 813.13,37.61 1001.73,37.61 1011.25,47.13 1011.25,71.96 1039.78,100.49 R6.1
LED2_G: R5.1 U1.R1 | length 273.3
  Top Layer w5: U1.R1 804.87,27.61 1005.87,27.61 1021.25,42.99 1021.25,67.82 1032.09,78.67 R5.1
LED2_R: R4.1 U1.N1 | length 249.5
  Top Layer w5: U1.N1 824.7,9.84 832.47,17.61 1010.01,17.61 R4.1@1037.73,45.33
NetC3_2: C3.2 L1.1 U1.H23 | length 98.5
  Top Layer w5.71: 495.49,-30.14 495.68,-30.34 C3.2@500.07,-34.72 ; C3.2 500.31,-43.5 562.6,-43.5 U1.H23
  Top Layer w20: L1.1@478.16,-30.34 495.68,-30.34
NetC9_1: C9.1 U1.N24 | length 41.4
  Top Layer w9.84: C9.1 531.11,22.78 544.04,9.84 U1.N24
NetC13_1: C13.1 U1.A18 | length 35.7
  Top Layer w9.84: U1.A18 625.79,-156.32 C13.1@630.94,-161.47
NetC20_1: C20.1 U1.AC5 | length 164
  Top Layer w7.24: U1.AC5 758.68,113.21 815.79,113.21 841.26,87.74 880.73,87.74 C20.1
NetD+_1: D+.1 J1.3 SB4.2 | length 275.3
  Top Layer w7.87: SB4.2 1352.38,25.59 cw(c1352.38,-10.57) v1(1377.95,15) ; v1(1415,-20) ccw(c1462.34,27.34) 1462.34,-39.61 J1.3
  Bottom Layer w7.87: D+.1@1381,15 1416,-20 v1@1419,-20
NetD-_1: D-.1 J1.2 SB3.2 | length 274.3
  Top Layer w7.87: SB3.2 1352.38,-25.59 ccw(c1352.38,10.57) v1(1377.95,-15) ccw(c1377.95,-10.42) 1381.19,-13.66 1415,20.15 cw(c1462.34,-27.19) 1462.34,39.76 J1.2
NetFB2_1: FB2.1 J1.4 UGND.1 | length 487.3
  Top Layer w20: FB2.1 1244.22,-127.78 1268,-104 1324,-104 v1(1344,-124) 1357.61,-137.61 J1.4@1569,-137.61
  Bottom Layer w20: v1(1344,-124) 1344,-122.54 UGND.1
NetL2_1: L2.1 L3.2 | length 41
  Top Layer w9.84: L3.2@875.7,-186.42 877,-185.12 L2.1@877,-146
NetL2_2: L2.2 U1.B3 | length 124.2
  Top Layer w9.84: U1.B3 778.27,-108.27 795.42,-125.42 828,-125.42 860.57,-92.85 L2.2@877,-92.85
NetL4_2: L4.2 U1.AB2 | length 179.7
  Top Layer w8: U1.AB2 812.19,98.43 835.5,75.11 911.47,75.11 936.36,100 L4.2
NetLD1_1: LD1.1 R3.2 | length 192.9
  Top Layer w5: R3.2 1062.22,-1.79 1076,-15.57 1076,-105.14 1080,-109.14 1080,-109.47 1091.34,-120.82 1091.34,-160 LD1.1
NetLD2_1: LD2.1 R4.2 | length 159.3
  Top Layer w5: R4.2 1090.66,73.77 1090.66,111.66 1118.25,139.25 1118.25,157.2 1134.83,173.78 LD2.1
NetLD2_2: LD2.2 R5.2 | length 76.7
  Top Layer w5: R5.2 1080.66,97.1 1080.66,142.47 LD2.2
NetLD2_3: LD2.3 R6.2 | length 71.4
  Top Layer w5: R6.2 1067.07,116.85 1067.07,157.2 1083.65,173.78 LD2.3
NetSB1_2: SB1.2 SB2.1 U1.Y2 | length 300.1
  Top Layer w8: U1.Y2 791,78.74 796.57,84.31 807.92,84.31 830.12,62.11 925.11,62.11 v1(933,70)
  Bottom Layer w10: SB2.1@890,144.94 919.76,144.94 ; v1(933,70) 920.47,82.53 920.47,144.23 919.76,144.94 ; SB1.2 941.24,144.94 932.74,144.94 919.76,144.94
P0.00/XL1: C17.1 U1.D2 X2.1 | length 249.2
  Top Layer w5: U1.D2 788.82,-73.19 812.37,-73.19 850.64,-34.92 960.72,-34.92 C17.1 999.74,-35.2 X2.1
P0.01/XL2: C18.1 U1.F2 X2.2 | length 414.7
  Top Layer w5: U1.F2 787.4,-63.19 808.23,-63.19 849.04,-22.39 1040.39,-22.39 1046,-28 1046,-79 1022.46,-102.54 X2.2 1019.22,-111.76 C18.1
P0.02: 0.02.1 U1.A12 | length 205
  Top Layer w5: 0.02.1@625,-300 625,-282 694.74,-212.26 694.74,-149.31 684.84,-139.41 U1.A12
P0.04: 0.04.1 U1.J1 | length 434.4
  Top Layer w5: U1.J1 813.61,-29.53 840.75,-2.39 1048.67,-2.39 1066,-19.72 1066,-116 1074,-124 v1(1074,-128)
  Bottom Layer w5: v1(1074,-128) 1074,-126.79 0.04.1
P0.09: 0.09.1 C28.2 U1.L24 | length 469.2
  Top Layer w5: v1(387,95) 394.34,87.66 435.96,87.66 454.14,69.48 480.37,69.48 490.62,59.22 490.62,21.33 501.99,9.96 526.36,9.96 546.16,-9.84 U1.L24 ; 0.09.1@425,283 425,300
  Bottom Layer w5: v1(387,95) 380,102 380,191.69 405.31,217 405.31,280.31 425,300
P0.10: 0.10.1 C29.1 U1.J24 | length 505.5
  Top Layer w5: 0.10.1@325,283 325,300 ; v1(362,95) 362.47,95 379.82,77.66 431.82,77.66 450,59.48 476.22,59.48 480.62,55.08 480.62,17.19 497.85,-0.04 522.21,-0.04 534,-11.82 534,-15.06 547.05,-28.1 U1.J24
  Bottom Layer w5: 325,300 344.68,280.31 344.68,217 370,191.68 370,103 v1(362,95)
P0.11: 0.11.1 U1.T2 | length 75.5
  Top Layer w5: U1.T2 783.27,56.85 v1(784.96,58.54)
  Bottom Layer w9.84: 0.11.1@775,110 784.96,100.04 v1(784.96,58.54)
P0.13: 0.13.1 U1.AD8 | length 487
  Top Layer w5.91: U1.AD8 724.21,136.48 804.82,217.09 976.51,217.09 998.32,238.9 1080.9,238.9 1125,283 1125,300
P0.14: 0.14.1 U1.AC9 | length 19.9
  Top Layer w5: U1.AC9 731.85,108.27 v1(733.54,109.96)
  Bottom Layer w9.84: v1(733.54,109.96) v1(733.54,109.96)
P0.15: 0.15.1 U1.AD10 | length 405.4
  Top Layer w5.91: U1.AD10 704.53,132.22 800.3,227.99 971.99,227.99 1025,281 1025,300
P0.17: 0.17.1 U1.AD12 | length 323.1
  Top Layer w5.91: U1.AD12 795.79,238.9 883.9,238.9 925,280 925,300
P0.20: 0.20.1 U1.AD16 | length 293.3
  Top Layer w5: U1.AD16 645.47,143.16 660.96,158.65 660.96,198.96 689,227 769.11,227 825,282.89 825,300
P0.22: 0.22.1 U1.AD18 | length 213.1
  Top Layer w5: U1.AD18 625.79,137.62 650.96,162.79 650.96,203.11 682,234.14 682,237 725,280 725,300
P0.24: 0.24.1 U1.AD20 | length 193.1
  Top Layer w5: U1.AD20 606.1,132.07 640.96,166.94 640.96,284.04 625,300
P0.26: 0.26.1 U1.G1 | length 453.6
  Top Layer w5: U1.G1 808.07,-49.21 844.89,-12.39 1044.53,-12.39 1056,-23.86 1056,-138 v1(1050,-144)
  Bottom Layer w5: v1(1050,-144) 1063.48,-157.48 0.26.1
P0.29: 0.29.1 U1.A10 | length 180.5
  Top Layer w5: U1.A10 704.74,-128.17 704.74,-279.74 0.29.1@725,-300
P0.31: 0.31.1 U1.A8 | length 245.7
  Top Layer w5: U1.A8 724.21,-138.79 714.74,-148.26 714.74,-213.74 739,-238 780,-238 825,-283 0.31.1@825,-300
P1.00: 1.00.1 U1.AD22 | length 258.1
  Top Layer w5: 525,300 585.65,239.35 624.65,239.35 630.96,233.04 630.96,171.08 587.84,127.95 U1.AD22
P1.01: 1.01.1 U1.Y23 | length 64.3
  Top Layer w5: v1(565.24,97.52) 566.73,96.02 U1.Y23
  Bottom Layer w5: v1(565.24,97.52) 577.72,110 1.01.1@605,110
P1.02: 1.02.1 U1.W24 | length 166.1
  Top Layer w5: v1(478,130.74) 502.79,130.74 516,117.53 516,95.82 542.93,68.9 U1.W24
  Bottom Layer w5: v1(478,130.74) 518.87,130.74 1.02.1
P1.04: 1.04.1 U1.U24 | length 150.8
  Top Layer w5: v1(497,112) 497,100.68 547.05,50.64 U1.U24
  Bottom Layer w5: v1(497,112) 497,93.55 1.04.1
P1.07: 1.07.1 U1.P23 | length 89
  Top Layer w5: v1(565.04,0.51) 566.73,2.2 U1.P23
  Bottom Layer w5: v1(565.04,0.51) 565.04,33.54 1.07.1
P1.10: 1.10.1 U1.A20 | length 416.9
  Top Layer w5: 1.10.1@325,-300 325,-296 381.65,-239.35 471.51,-239.35 481.51,-229.35 549.37,-229.35 559.37,-219.35 601.65,-219.35 619.66,-201.34 619.66,-173.48 606.1,-159.93 U1.A20
P1.11: 1.11.1 U1.B19 | length 19.9
  Top Layer w5.71: v1(596.77,-109.96) 598.46,-108.27 U1.B19
P1.13: 1.13.1 U1.A16 | length 387.6
  Top Layer w5: 1.13.1@425,-300 425,-283 458,-250 475,-250 485.65,-239.35 553.51,-239.35 563.51,-229.35 649.37,-229.35 674.66,-204.06 674.66,-166.09 674.74,-166 674.74,-157.59 645.47,-128.32 U1.A16
P1.15: 1.15.1 U1.A14 | length 296.6
  Top Layer w5: 1.15.1@525,-300 525,-282 567.65,-239.35 653.51,-239.35 684.74,-208.11 684.74,-153.45 665.16,-133.87 U1.A14
RESET: C27.2 P1.10 R2.1 SW2.1 U1.AC13 U1.AC15 U1.AC17 U1.AC19 U1.AC21 | length 1147.8
  Top Layer w5: SW2.1@311.54,42.13 290,63.68 290,162.32 311.54,183.87 352.91,142.5 411.5,142.5 v1(418,149) ; C27.2 552.22,164.28 v1(554.5,162) 554.5,178.72 R2.1 ; v1@553.82,155.18 553.82,121.9 560.68,115.04 589.49,115.04 U1.AC21 U1.AC19 U1.AC17 U1.AC15 U1.AC13
  Bottom Layer w5: v1(418,149) 541.5,149 v1(554.5,162) 582.69,162 598.69,146 605.26,146 623.63,127.63 623.63,15.51 649.14,-10 782.48,-10 808.48,-36 808.48,-76.48 832,-100 P1.10
RF: C4.2 C25.1 L1.2 R1.1 | length 285.5
  Top Layer w35: 272,-197 306,-197 ccw(c306,-137) 366,-137 366,-90 cw(c426,-90) 426,-30 442,-30
SW1: SW1.1 U1.R24 | length 199.7
  Top Layer w5: SW1.1 460.32,123.22 534.13,49.41 534.13,43.86 U1.R24@547.05,30.95
SWDCLK: J2.4 P1.4 pad.3@1325,-200 SWDCLK.1 U1.AA24 | length 2007.2
  Top Layer w5: v1(545,232) 497.53,232 480.62,215.09 480.62,167.05 526,121.67 526,99.97 537.38,88.58 U1.AA24
  Bottom Layer w5: P1.4 840,50 790,0 653.28,0 633.63,19.65 633.63,131.77 613.45,151.95 609.4,156 602.83,156 582.66,176.17 582.66,193.7 571.7,204.66 561.32,204.66 551.16,214.82 551.16,225.84 v1(545,232) 552.35,239.35 1218.65,239.35 1328.5,129.5 1328.5,99.5 1293,64 1293,-27 J2.4 1293.03,-50 1325,-81.97 1325,-200 1325,-218.9 1325,-236.61
SWDIO: J2.2 P1.2 pad.3@1325,200 SWDIO.1 U1.AC24 | length 1742.4
  Top Layer w5: U1.AC24 536,119.31 536,125.81 490.62,171.19 490.62,204.62 500.66,214.66 561.16,214.66 v1(568.5,222) ; v1(1309,123) 1309,220.61 1325,236.61
  Bottom Layer w5: P1.2@859,100 831.69,100 808.48,76.8 808.48,32.63 785.86,10 657.42,10 643.63,23.79 643.63,135.91 613.55,166 606.97,166 592.66,180.32 592.66,197.84 v1(568.5,222) 575.85,229.35 1214.51,229.35 1309,134.86 v1(1309,123) 1309,94.39 J2.2@1265,50.39 ; SWDIO.1@1325,222 1325,236.61
VBUS: C21.2 C23.2 C24.2 D1.4 FB1.1 J1.1 J2.5 VBUS1.1 VBUS2.1 | length 1396
  Top Layer w15: D1.4 1170,47.76 v1(1170,135) ; FB1.1 C21.2 1187,-107 1220,-74 1220.8,-74.8 v1(1293.31,-74.8) 1299.2,-74.8 1309.04,-64.96 v1(1338.58,-64.96) ; v1(1225,193) 1252.91,193 1281,164.91 1281,108 1317,72 v1(1335,72) 1365.5,102.5 1470.5,102.5 1506.19,138.19 J1.1
  Bottom Layer w15: VBUS1.1@1125,-300 1149,-276 1169,-276 1242,-203 1242,-126.11 v1(1293.31,-74.8) ; v1(1170,135) 1225,190 v1(1225,193) ; v1(1338.58,-64.96) 1345.47,-58.07 1345.47,61.53 v1(1335,72) 1351.58,88.58 VBUS2.1
VBUS_nRF: C19.1 C22.2 FB1.2 SB2.2 U1.AD2 | length 617.5
  Top Layer w9.84: U1.AD2 783.27,132.27 822,171 863,171 v1(865,173)
  Top Layer w15: v1(1125,11) 1126,11 1136.5,0.5 1136.5,-66.15 1128.22,-74.43 C22.2 ; C22.2 FB1.2
  Bottom Layer w10: v1@863,173.3 v1@863.85,174.15 ; v1(865,173) 889.7,173 SB2.2 918.71,202.01 975.88,202.01 1039.89,138 1061,138 1078,121 1078,59 1125,12 v1(1125,11)